# EAGLE board OLM-base_v0.9 (EAGLE 6.4)
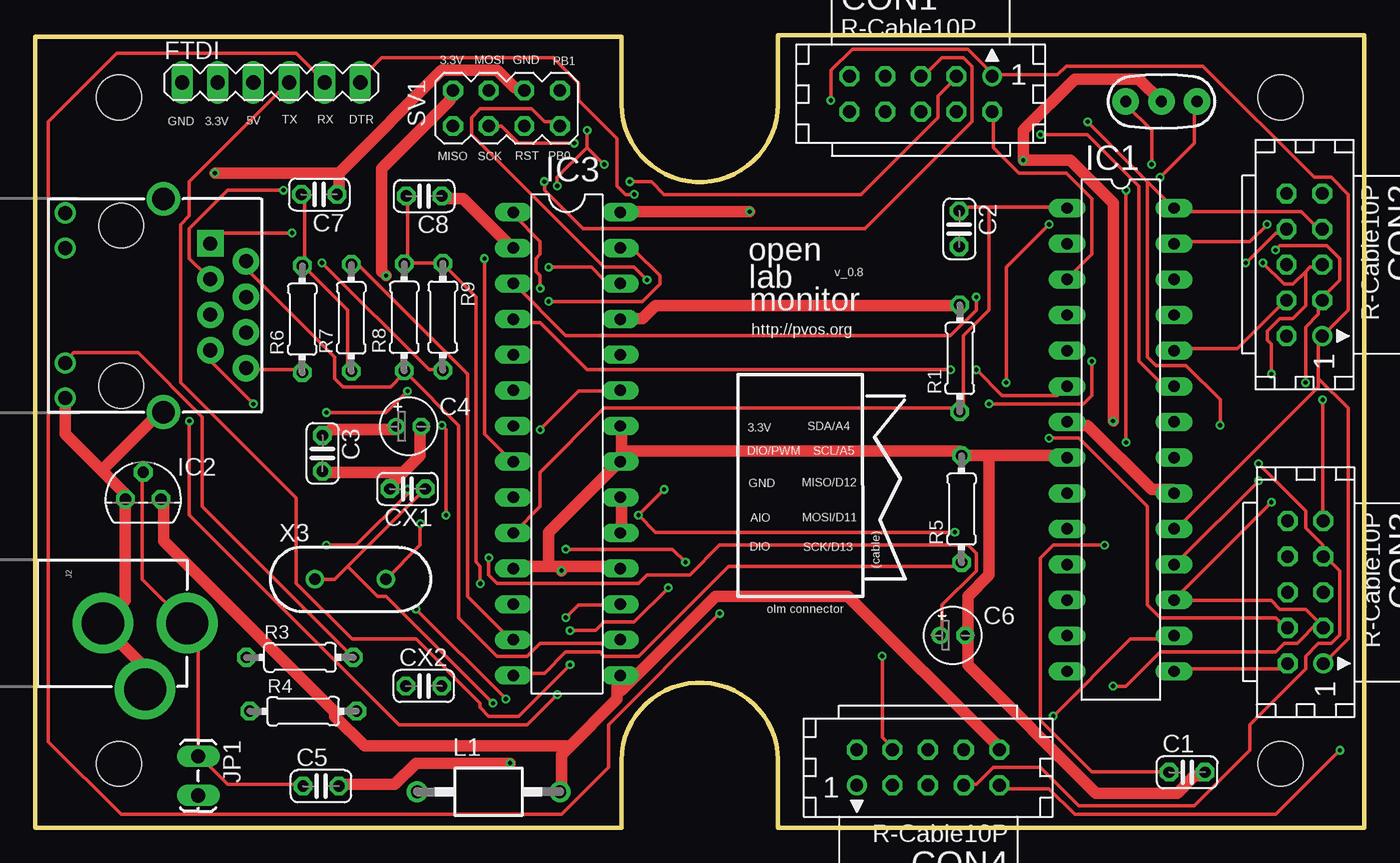
[diagram p0: board, top side]
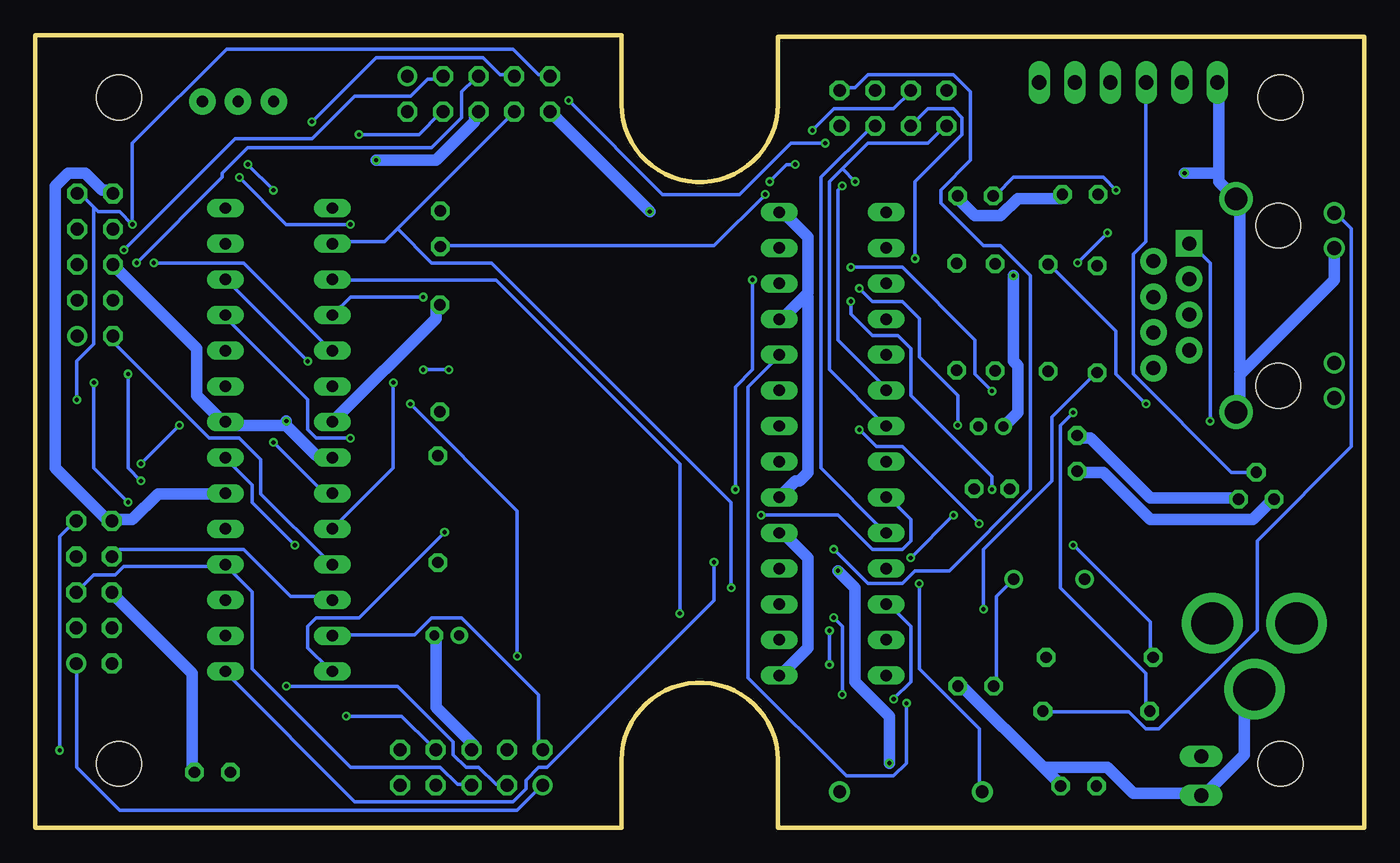
[diagram p1: board, bottom side, seen from below]

Size 94.74 x 56.52 mm. Coordinates in mm from the lower left corner, seen from the top.
Outline: 94.62,0 52.96,0 52.96,4.85
Outline: 41.78,4.9 41.78,0 0,0 0,56.39 41.78,56.39 41.78,51.51
Outline: 41.78,4.83 arc-179 52.96,4.83
Outline: 41.78,51.56 arc179 52.96,51.56 52.96,56.52 94.74,56.52 94.74,0
Copper layers (1*16): Top 0.035mm / dielectric 1.5mm / Bottom 0.035mm
Design rules "EagleRules": minimum track width 7mil, minimum drill 12mil, track to track 7mil, track to pad 7mil, pad to pad 7mil, via to via 7mil, smd to smd 0mil, copper to edge 20mil, drill to drill 10mil, minimum pad ring 10mil, minimum via ring 6mil, stop-mask expansion 2mil, vias tented up to drill 25mil, thermal gap 10mil
Net classes: 0 default: width 0.254 mm, drill 0.254 mm, clearance 0.254 mm; 1 power: width 0.813 mm, drill 0.254 mm, clearance 0.254 mm; 2 gnd: width 0.305 mm, drill 0.559 mm, clearance 0.254 mm
Holes 3.2 mm at 5.97,52.07 88.77,52.07 88.77,4.57 5.97,4.57

## Footprints (pad centres in the part's own frame; a part is rotated, then mirrored left to right if it is on the bottom)
C025-024X044 = drill 0.813 octagon: 1 -1.27,0; 2 1.27,0
E1,8-4 = drill 0.711 pad 1.168: + -0.889,0 | drill 0.711 pad 1.168 octagon: - 0.889,0
CON10L = drill 0.914: 1 5.08,1.27 | drill 0.914 octagon: 2 5.08,-1.27; 3 2.54,1.27; 4 2.54,-1.27; 5 0,1.27; 6 0,-1.27; 7 -2.54,1.27; 8 -2.54,-1.27; 9 -5.08,1.27; 10 -5.08,-1.27
MA06-1 = drill 1.016 long: 1 0,0; 2 2.54,0; 3 5.08,0; 4 7.62,0; 5 10.16,0; 6 12.7,0
DIL28-3 = drill 0.813 long: 1 -16.51,-3.81; 2 -13.97,-3.81; 3 -11.43,-3.81; 4 -8.89,-3.81; 5 -6.35,-3.81; 6 -3.81,-3.81; 7 -1.27,-3.81; 8 1.27,-3.81; 9 3.81,-3.81; 10 6.35,-3.81; 11 8.89,-3.81; 12 11.43,-3.81; 13 13.97,-3.81; 14 16.51,-3.81; 15 16.51,3.81; 16 13.97,3.81; 17 11.43,3.81; 18 8.89,3.81; 19 6.35,3.81; 20 3.81,3.81; 21 1.27,3.81; 22 -1.27,3.81; 23 -3.81,3.81; 24 -6.35,3.81; 25 -8.89,3.81; 26 -11.43,3.81; 27 -13.97,3.81; 28 -16.51,3.81
TO92 = drill 0.813 octagon: 1 -1.27,0; 2 0,1.905; 3 1.27,0
MAGJACK = drill 1 pad 1.88 square: 1 3.175,17.445 | drill 1 pad 1.88: 2 4.445,19.985; 3 5.715,17.445; 4 6.985,19.985; 5 8.255,17.445; 6 9.525,19.985; 7 10.795,17.445; 8 12.065,19.985 | drill 1 pad 1.27: 9 1,7.1; 10 3.5,7.1; 11 11.7,7.1; 12 14.2,7.1 | drill 1.6 pad 2.184: M1 0,14.1; M2 15.2,14.1 | hole 3.2: 1.905,11.095; 13.335,11.095
POWER_JACK_PTH = drill 2.997 pad 4.318: GND 0,7.7; GNDBREAK 4.7,10.7; PWR 0,13.7
1X02_LOCK_LONGPADS = drill 1.016 long: 1 -0.127,0; 2 2.667,0
BL01RN1A = drill 0.9 pad 1.5: 1 -5.08,0; 2 5.08,0
0204/7 = drill 0.813 octagon: 1 -3.81,0; 2 3.81,0
MA04-2 = drill 0.9 octagon: 1 -3.81,-1.27; 2 -3.81,1.27; 3 -1.27,-1.27; 4 -1.27,1.27; 5 1.27,-1.27; 6 1.27,1.27; 7 3.81,-1.27; 8 3.81,1.27
RESONATOR-PTH = drill 0.8 pad 1.88: 1 -2.54,0; 2 0,0; 3 2.54,0
HC49US = drill 0.813: 1 -2.54,0; 2 2.54,0

## Placement (x,y rotation side)
C1  0.1µ  [C025-024X044]  82.1,3.96 0 top
C2  0.1µ  [C025-024X044]  65.87,42.71 270 top
C3  0.1µ  [C025-024X044]  20.48,26.7 270 top
C4  10µ  [E1,8-4]  26.63,28.62 0 top
C5  0.1µ  [C025-024X044]  20.37,2.98 0 top
C6  10u  [E1,8-4]  65.4,13.73 0 top
C7  0.1µ  [C025-024X044]  20.25,45.15 180 top
C8  0.1µ  [C025-024X044]  27.73,45.04 180 top
CON1  [CON10L]  63.13,52.32 0 top
CON2  [CON10L]  90.46,40.15 270 top
CON3  [CON10L]  90.54,16.79 270 top
CON4  [CON10L]  63.64,4.3 180 top
CX1  18p  [C025-024X044]  26.54,24.16 180 top
CX2  18p  [C025-024X044]  27.7,10.12 0 top
FTDI  FTDI  [MA06-1]  10.48,53.13 0 top
IC1  ATMEGA  [DIL28-3]  77.38,27.67 270 top
IC2  MCP1702-33  [TO92]  7.71,23.44 0 top
IC3  ENC28J60SP  [DIL28-3]  37.9,27.38 270 top
J1  MAGJACK  [MAGJACK]  -4.96,44.84 270 top
J2  POWER_JACKPTH  [POWER_JACK_PTH]  -2.86,14.59 270 top
JP1  BATT  [1X02_LOCK_LONGPADS]  11.63,4.98 270 top
L1  BL01RN1A  [BL01RN1A]  32.32,2.57 0 top
R1  10k  [0204/7]  65.91,33.47 90 top
R3  1K  [0204/7]  18.88,12.15 0 top
R4  1K  [0204/7]  19.11,8.31 0 top
R5  2.32K  [0204/7]  66.03,22.73 90 top
R6  49.9  [0204/7]  19.04,36.27 90 top
R7  49.9  [0204/7]  22.53,36.36 90 top
R8  49.9  [0204/7]  26.31,36.39 90 top
R9  49.9  [0204/7]  29.06,36.42 270 top
SV1  SPI/ISP  [MA04-2]  33.6,51.3 0 top
X1  16 MHz  [RESONATOR-PTH]  80.27,51.78 0 top
X3  25MHz  [HC49US]  22.47,17.72 0 top

## Library data of the parts
C1-C8 CX1 CX2 R1 = resistor
CON1-CON4 = con-harting; OC_FARNELL: unknown; OC_NEWARK: unknown
FTDI IC2 SV1 = JeeLabs
IC1 = atmega8
IC3 = microchip; MF: MICROCHIP; MPN: ENC28J60/SP; OC_FARNELL: 1084619; OC_NEWARK: 96K3661
J1 JP1 X1 X3 = SparkFun
J2 = SparkFun-Connectors
L1 = inductors
R3-R9 = rcl

## Nets
A0: CON1.4 IC1.23
A1: CON2.4 IC1.24
A2: CON3.4 IC1.25
A3: CON4.4 IC1.26
D0/RX: CON1.8 FTDI.4 IC1.2
D1/TX: CON1.2 FTDI.5 IC1.3
D2: IC1.4 IC3.3
D3/PWM: CON2.8 IC1.5
D4: IC1.6 IC3.4
D5/PWM: CON2.2 IC1.11
D6/PWM: CON3.8 IC1.12
D7: CON4.2 IC1.13
D10/PWM: CON4.8 IC1.16
GND [power]: C1.2 C3.2 C4.- C5.2 C6.- C7.1 C8.1 CON1.6 CON2.6 CON3.6 CON4.6 CX1.2 CX2.2 FTDI.1 IC1.8 IC1.22 IC2.1 IC3.2 IC3.11 IC3.18 IC3.21 IC3.22 J1.10 J1.12 J1.M1 J1.M2 J2.GND J2.GNDBREAK JP1.2 R5.2 SV1.6 X1.2
LEDA: J1.11 R3.2
LEDB: J1.9 R4.2
MISO/D12: CON1.5 CON2.5 CON3.5 CON4.5 IC1.18 IC3.7 SV1.1
MOSI/D11: CON1.3 CON2.3 CON3.3 CON4.3 IC1.17 IC3.6 SV1.4
N$1: IC1.9 X1.1
N$19: C1.1 IC1.21
N$20: C2.2 FTDI.6
N$21: IC1.10 X1.3
N$37: IC3.27 R3.1
N$39: IC3.26 R4.1
N$50: C6.+ IC3.1
N$51: IC3.14 R5.1
N$52: CX1.1 IC3.24 X3.1
N$53: CX2.1 IC3.23 X3.2
N$54: C7.2 R6.2 R7.1
PB0/D8: IC1.14 IC3.9 SV1.7
PB1/D9/PWM: CON3.2 IC1.15 SV1.8
RD+: IC3.13 J1.7 R7.2
RD-: IC3.12 J1.8 R6.1
RESET: C2.1 IC1.1 IC3.10 R1.1 SV1.5
SCK/D13: CON1.1 CON2.1 CON3.1 CON4.1 IC1.19 IC3.8 SV1.3
SCL/A5: CON1.7 CON2.7 CON3.7 CON4.7 IC1.28
SDA/A4: CON1.9 CON2.9 CON3.9 CON4.9 IC1.27
TCT: C8.2 J1.3 L1.1 R8.2 R9.1
TD+: IC3.17 J1.1 R9.2
TD-: IC3.16 J1.2 R8.1
VCC [power]: C3.1 C4.+ CON1.10 CON2.10 CON3.10 CON4.10 IC1.7 IC1.20 IC2.3 IC3.15 IC3.19 IC3.20 IC3.25 IC3.28 L1.2 R1.2 SV1.2
VIN: C5.1 FTDI.3 IC2.2 J2.PWR JP1.1

## Tracks (layer width: path | path; a pad name or v marks a point on that pad's centre or on a via)
A0  (via drill 0.3)
  Top 0.254: v71.65,49.42 75.01,49.42 78.66,45.76 78.66,33.27 80.19,31.74 81.1,31.74 IC1.23
  Bottom 0.254: v71.65,49.42 67.39,49.42 65.86,50.95 CON1.4
A1
  Top 0.254: IC1.24 81.41,34.18 85.67,34.18 89.03,37.53 CON2.4
A2  (via drill 0.3)
  Top 0.254: v72.26,27.78 74.4,27.78 79.27,22.9 79.27,15.89 80.19,14.98 88.42,14.98 89.03,14.37 CON3.4
  Bottom 0.254: v72.26,27.78 74.7,27.78 75.31,28.39 75.31,30.52 81.1,36.31 IC1.25
A3  (via drill 0.3)
  Top 0.254: v75.31,33.27 75.31,30.83 74.7,30.22 v68,30.22 | v60.38,12.24 60.38,6.44 60.99,5.83 CON4.4
  Bottom 0.254: v75.31,33.27 81.1,39.06 IC1.26 | v68,30.22 60.38,22.6 v60.38,12.24
D0/RX  (via drill 0.3)
  Top 0.254: v38.13,11.63 34.47,7.97 32.33,7.97 31.72,8.58 31.72,8.88 27.15,13.45 22.58,13.45 18.62,17.42 18.62,23.51 10.39,31.74 10.39,43.02 11,43.63 11,46.07 18.01,53.08 FTDI.4 | v38.13,14.06 39.95,14.06 40.56,14.67 42.7,14.67 v45.14,17.11
  Bottom 0.254: 68.91,42.72 60.68,50.95 CON1.8 | 68.91,42.72 69.82,41.8 73.48,41.8 IC1.2 | v38.13,14.06 v38.13,11.63 | v45.14,17.11 45.14,23.21 62.2,40.28 66.47,40.28 68.91,42.72
D1/TX  (via drill 0.3)
  Top 0.254: IC1.3 73.79,39.36 75.31,40.89 75.31,44.85 73.48,46.68 70.13,46.68 68.3,48.51 68.3,50.95 CON1.2 | v48.79,15.28 40.87,7.36 40.87,4.31 37.52,0.96 6.12,0.96 0.94,6.14 0.94,50.34 5.82,55.21 18.62,55.21 20.45,53.38 FTDI.5
  Bottom 0.254: v48.79,15.28 48.79,25.95 61.9,39.06 73.48,39.06 IC1.3
D2  (via drill 0.3)
  Top 0.254: v67.08,37.84 67.08,36.92 65.25,35.1 37.82,35.1 34.16,38.75 IC3.3
  Bottom 0.254: v67.08,37.84 72.26,37.84 73.48,36.62 IC1.4
D3/PWM  (via drill 0.3)
  Top 0.254: v86.28,40.28 88.42,42.41 89.03,42.41 CON2.8
  Bottom 0.254: v86.28,40.28 79.88,40.28 73.79,34.18 IC1.5
D4  (via drill 0.3)
  Top 0.254: v65.25,32.66 39.34,32.66 35.99,36.01 34.16,36.01 IC3.4 | v67.08,32.66 68.91,30.83 72.87,30.83 73.48,31.44 IC1.6
  Bottom 0.254: v67.08,32.66 v65.25,32.66
D5/PWM
  Bottom 0.254: IC1.11 73.79,18.94 78.66,23.82 78.66,26.26 80.19,27.78 82.32,27.78 89.33,34.79 CON2.2
D6/PWM
  Bottom 0.254: IC1.12 73.79,16.5 76.53,16.5 79.88,19.86 88.72,19.86 89.03,19.55 CON3.8
D7
  Bottom 0.254: IC1.13 73.48,13.76 67.69,13.76 66.47,14.98 64.34,14.98 58.85,9.49 58.85,5.83 CON4.2
D10/PWM  (via drill 0.3)
  Top 0.254: v72.57,7.97 78.05,13.45 81.1,13.45 IC1.16
  Bottom 0.254: v72.57,7.97 68.61,7.97 66.47,5.83 CON4.8
GND  (via drill 0.3)
  Top 0.813: 26.09,25.19 25.32,24.43 CX1.2 | 26.09,25.19 27.46,26.56 27.46,28.39 C4.- | C3.2 20.75,25.34 25.93,25.34 26.09,25.19 | 4.75,25.49 6.43,23.82 IC2.1 6.43,23.21 6.43,16.2 4.9,14.67 J2.GND 4.9,14.37 7.65,11.63 7.65,10.1 J2.GNDBREAK | 4.75,25.49 2.16,28.09 2.16,30.52 J1.12 | C8.1 29.29,44.85 30.51,44.85 33.86,41.5 IC3.2 | 21.67,46.68 28.98,53.99 32.94,53.99 34.16,52.77 34.77,52.77 SV1.6 | 21.67,46.68 21.67,45.15 C7.1 | v12.83,46.68 21.67,46.68 | 4.75,25.49 8.86,29.61 J1.M2 | X1.2 80.19,51.86 78.66,53.38 74.09,53.38 70.43,49.73 v70.43,47.59 73.79,47.59 76.84,44.54 v76.84,29 | 41.78,26.87 41.78,28.39 IC3.22 | 41.78,26.87 41.78,26.26 IC3.21 41.48,25.95 36.6,21.07 36.6,18.64 | 37.52,18.64 41.48,18.64 IC3.18 | 37.52,18.64 36.6,18.64 | 36.6,18.64 34.16,18.64 IC3.11 | 68,26.56 66.17,26.56 R5.2 65.86,26.87 41.78,26.87 | 68,26.56 73.48,26.56 IC1.8 | 68,26.56 68,18.03 66.47,16.5 66.47,13.76 C6.- 66.47,13.45 66.47,11.63 75.62,2.48 81.41,2.48 82.63,3.7 83.24,3.7 C1.2 | v33.86,4.62 27.15,4.62 25.63,3.09 21.67,3.09 C5.2 | v37.52,18.33 37.52,18.64
  Bottom 0.813: 22.73,4.16 28.68,10.1 CX2.2 | 22.73,4.16 21.67,3.09 C5.2 | 22.73,4.16 22.58,4.31 18.31,4.31 16.48,2.48 11.91,2.48 JP1.2 11.3,2.48 8.56,5.23 8.56,9.19 7.95,9.8 J2.GNDBREAK | C3.2 20.45,25.34 18.62,25.34 15.27,21.99 7.95,21.99 6.73,23.21 IC2.1 | C7.1 21.67,44.85 24.71,44.85 25.93,43.63 27.76,43.63 28.98,44.85 C8.1 | 10.39,46.68 10.39,46.07 9.17,44.85 J1.M1 8.86,44.54 8.86,32.66 8.71,32.5 | 10.39,46.68 10.39,53.08 FTDI.1 | 8.71,32.5 8.86,32.35 8.86,29.91 J1.M2 | 8.71,32.5 2.16,39.06 2.16,41.19 J1.10 | 10.39,46.68 v12.83,46.68 | v70.43,47.59 66.17,47.59 63.42,50.34 63.42,50.95 CON1.6 | C1.2 83.54,4.01 83.54,11.02 89.03,16.5 CON3.6 | C6.- 66.17,13.45 66.17,8.58 63.42,5.83 CON4.6 | 76.84,28.69 81.1,28.69 IC1.22 81.41,29 83.24,30.83 83.24,34.18 89.03,39.97 CON2.6 | 76.84,28.69 74.7,26.56 73.79,26.56 IC1.8 | v76.84,29 76.84,28.69 | v33.86,4.62 33.86,7.97 36.3,10.41 36.3,17.11 v37.52,18.33
LEDA
  Top 0.254: R3.2 22.58,12.24 11.91,22.9 11.91,29.3 7.34,33.88 2.77,33.88 2.16,33.27 J1.11
LEDB
  Bottom 0.254: R4.2 22.89,8.27 16.79,8.27 15.57,7.05 14.66,7.05 7.65,14.06 7.65,20.47 0.94,27.17 0.94,42.72 1.85,43.63 J1.9
MISO/D12  (via drill 0.3)
  Top 0.254: 90.55,39.67 89.64,38.75 89.03,38.75 v87.5,40.28 | 90.55,39.67 90.86,39.97 91.47,39.97 CON2.5 | v36.3,46.07 36.3,45.46 39.04,42.72 59.16,42.72 66.78,50.34 66.78,54.3 66.17,54.91 64.64,54.91 63.42,53.69 CON1.5 | v87.2,24.73 81.41,18.94 IC1.18 | v88.11,32.35 88.11,34.49 87.81,34.79 87.81,35.4 88.72,36.31 89.64,36.31 90.55,37.23 90.55,39.67
  Bottom 0.254: CON3.5 91.77,16.81 90.55,18.03 89.03,18.03 88.42,18.64 81.41,18.64 IC1.18 81.1,18.64 79.27,16.81 79.27,11.32 72.26,4.31 65.86,4.31 64.64,3.09 63.73,3.09 CON4.5 | 37.21,46.98 35.38,48.81 31.12,48.81 29.9,50.03 SV1.1 | 37.21,46.98 38.13,46.07 38.13,32.66 34.16,28.69 IC3.7 | v87.5,40.28 81.41,46.37 81.41,46.68 79.58,48.51 66.47,48.51 64.34,50.64 64.34,52.47 63.42,53.38 CON1.5 | v36.3,46.07 37.21,46.98 | v87.2,24.73 88.11,25.65 v88.11,32.35
MOSI/D11  (via drill 0.3)
  Top 0.254: v37.21,45.76 37.21,46.37 39.34,48.51 | v39.34,49.73 39.34,48.51 | 91.47,14.67 91.77,14.37 CON3.3 91.47,14.67 | 91.47,14.67 90.55,15.59 88.72,15.59 88.11,16.2 81.41,16.2 IC1.17 81.41,16.5 v88.11,23.21 | v76.84,10.1 77.75,10.1 80.19,12.54 88.42,12.54 89.03,13.15 89.94,13.15 91.47,14.67 | v90.55,31.74 90.55,35.71 91.47,36.62 91.47,37.53 CON2.3 91.77,37.84 92.99,39.06 92.99,40.58 92.08,41.5 88.72,41.5 v88.42,41.19 | v40.56,47.29 39.34,48.51 | v42.39,46.07 43.92,46.07 44.83,45.15 58.85,45.15 64.34,50.64 64.34,52.16 65.56,53.38 CON1.3
  Bottom 0.254: v37.21,45.76 37.52,45.46 37.52,34.79 34.16,31.44 IC3.6 | v39.34,49.73 37.82,51.25 33.55,51.25 32.33,52.47 SV1.4 | v76.84,10.1 68.91,10.1 64.95,6.14 64.95,5.23 64.03,4.31 63.12,4.31 61.9,3.09 61.29,3.09 CON4.3 | v90.55,31.74 90.55,25.65 v88.11,23.21 | v88.42,41.19 80.49,49.12 75.01,49.12 71.96,52.16 68,52.16 66.78,53.38 65.86,53.38 CON1.3 | v40.56,47.29 41.17,47.29 v42.39,46.07
N$1  (via drill 0.3)
  Top 0.254: v77.75,45.46 v77.75,27.48 | v79.58,47.29 79.58,49.73 77.75,51.55 X1.1
  Bottom 0.254: v77.75,27.48 74.4,24.12 73.79,24.12 IC1.9 | v79.58,47.29 v77.75,45.46
N$19  (via drill 0.3)
  Top 0.254: v76.23,20.16 72.57,20.16 71.65,19.25 71.65,7.66 75.31,4.01 80.8,4.01 C1.1
  Bottom 0.254: v76.23,20.16 79.27,23.21 79.27,24.43 81.1,26.26 IC1.21
N$20  (via drill 0.3)
  Top 0.254: v42.7,45.15 42.09,45.15 41.48,45.76 41.48,49.12 38.74,51.86 38.74,53.08 36.91,54.91 24.71,54.91 23.19,53.38 FTDI.6
  Bottom 0.254: v42.7,45.15 46.36,41.5 65.86,41.5 C2.2
N$21  (via drill 0.3)
  Top 0.254: v69.22,31.74 69.22,39.97 v72.26,43.02 | v80.19,46.37 82.63,48.81 82.63,51.55 X1.3
  Bottom 0.254: v69.22,31.74 69.22,25.65 73.48,21.38 IC1.10 | v72.26,43.02 76.84,43.02 v80.19,46.37
N$37  (via drill 0.3)
  Top 0.254: v20.75,20.16 22.89,20.16 26.54,23.82 v26.54,24.12 | v36.6,37.53 43.31,37.53 44.53,38.75 44.53,39.36 42.7,41.19 41.78,41.19 IC3.27
  Bottom 0.254: v20.75,20.16 15.27,14.67 15.27,12.24 R3.1 | v26.54,24.12 26.54,25.04 32.33,30.83 32.33,34.18 33.25,35.1 35.08,35.1 36.6,36.62 v36.6,37.53
N$39  (via drill 0.3)
  Top 0.254: v20.75,29.61 25.02,29.61 v26.54,31.13 | v36.6,39.97 39.65,39.97 40.56,39.06 41.48,39.06 IC3.26
  Bottom 0.254: v20.75,29.61 21.67,28.69 21.67,17.11 15.57,11.02 15.57,8.58 R4.1 | v26.54,31.13 27.76,32.35 27.76,34.79 32.94,39.97 v36.6,39.97
N$50  (via drill 0.3)
  Top 0.254: v32.33,19.25 32.33,18.03 32.94,17.42 43,17.42 43.61,18.03 46.66,18.03 48.79,20.16 66.47,20.16 67.08,19.55 67.08,18.33 64.64,15.89 64.64,13.76 C6.+ | v29.29,22.29 29.29,28.39 v28.98,28.69 | v35.99,38.45 35.99,39.36 35.69,39.67 35.69,40.58 35.99,40.89 35.99,41.8 34.16,43.63 IC3.1
  Bottom 0.254: v29.29,22.29 v32.33,19.25 | v28.98,28.69 28.98,30.83 31.72,33.57 31.72,36.31 32.94,37.53 35.08,37.53 v35.99,38.45
N$51
  Top 0.254: IC3.14 34.16,11.02 36.3,11.02 37.82,12.54 40.26,12.54 40.56,12.24 43,12.24 49.4,18.64 65.86,18.64 R5.1
N$52  (via drill 0.3)
  Top 0.254: X3.1 21.36,17.72 22.28,18.64 | 22.28,18.64 27.76,24.12 CX1.1 | v32.64,8.88 25.02,16.5 24.41,16.5 22.28,18.64
  Bottom 0.254: v32.64,8.88 32.64,4.62 33.55,3.7 36.91,3.7 43.92,10.71 43.92,31.44 41.78,33.57 IC3.24
N$53  (via drill 0.3)
  Top 0.254: v35.99,28.39 38.74,31.13 41.48,31.13 IC3.23 | v27.46,21.68 27.46,20.16 X3.2
  Bottom 0.254: CX2.1 26.24,10.41 26.24,16.5 X3.2 | v35.99,28.39 34.77,27.17 32.94,27.17 v27.46,21.68
N$54
  Top 0.254: R7.1 22.28,32.66 22.28,36.92 19.23,39.97 R6.2 19.23,40.28 19.23,44.85 C7.2
PB0/D8  (via drill 0.3)
  Top 0.254: v65.56,21.07 44.22,21.07 v43,22.29 v44.83,24.12 | v43.61,39.06 42.7,39.97 40.56,39.97 31.12,49.42 31.12,50.64 31.72,51.25 35.38,51.25 36.3,50.34 37.21,50.34 SV1.7
  Bottom 0.254: v65.56,21.07 71.65,14.98 74.7,14.98 75.31,14.37 75.31,12.85 73.79,11.32 IC1.14 | v43,22.29 37.52,22.29 35.08,19.86 32.94,19.86 32.33,20.47 32.33,21.99 33.86,23.51 IC3.9 | v43.61,39.06 43.61,32.66 44.83,31.44 v44.83,24.12
PB1/D9/PWM  (via drill 0.3)
  Top 0.254: IC1.15 81.41,11.32 88.72,11.32 89.03,11.63 CON3.2 | v37.82,19.86 45.44,19.86 v46.36,18.94
  Bottom 0.254: v37.82,19.86 35.38,17.42 32.94,17.42 32.03,18.33 29.59,18.33 23.8,24.12 23.8,39.36 25.93,41.5 27.15,41.5 30.2,44.54 30.2,45.46 28.07,47.59 28.07,52.47 29.29,53.69 35.38,53.69 36.3,52.77 37.21,52.77 SV1.8 | v46.36,18.94 46.36,16.2 58.24,4.31 58.85,4.31 59.77,3.4 59.77,2.79 60.68,1.87 71.96,1.87 81.1,11.02 IC1.15
RD+  (via drill 0.3)
  Top 0.254: IC3.13 33.86,13.45 30.81,16.5 30.81,32.35 23.19,39.97 22.58,39.97 R7.2 | v15.57,30.22 12.52,33.27 12.52,33.88 J1.7
  Bottom 0.254: v15.57,30.22 17.7,32.35 17.7,35.4 22.28,39.97 R7.2
RD-  (via drill 0.3)
  Top 0.254: R6.1 18.92,32.66 15.27,32.66 J1.8 | v27.15,15.59 v33.55,9.19
  Bottom 0.254: v33.55,9.19 32.33,10.41 32.33,14.37 33.86,15.89 IC3.12 | v27.15,15.59 27.15,19.86 22.28,24.73 22.28,29.3 19.23,32.35 R6.1
RESET
  Top 0.254: 68,44.24 73.48,44.24 IC1.1 | 68,44.24 66.17,44.24 C2.1 | 68,44.24 68,36.92 66.17,35.1 66.17,29.91 R1.1 65.86,29.91 40.56,29.91 35.99,25.34 35.99,22.9 34.16,21.07 IC3.10
  Bottom 0.254: IC3.10 34.16,21.07 38.74,25.65 38.74,46.37 35.08,50.03 SV1.5
SCK/D13  (via drill 0.3)
  Top 0.254: v32.03,40.58 32.03,28.09 33.86,26.26 IC3.8 | 91.47,32.05 91.47,34.79 CON2.1 91.77,35.1 93.6,36.92 93.6,45.15 92.38,46.37 91.16,46.37 83.24,54.3 73.48,54.3 72.87,53.69 68.3,53.69 | 91.47,32.05 91.47,31.44 81.41,21.38 IC1.19 | v38.43,48.81 34.47,48.81 33.25,50.03 SV1.3 | v56.72,51.86 56.72,53.99 58.24,55.52 66.47,55.52 68.3,53.69 | 68.3,53.69 CON1.1 | 91.47,32.05 93.6,29.91 93.6,13.45 92.08,11.93 CON3.1
  Bottom 0.254: CON4.1 58.85,2.79 60.38,1.26 88.72,1.26 91.77,4.31 91.77,11.63 CON3.1 | v32.03,40.58 32.03,46.07 28.68,49.42 28.68,50.64 29.29,51.25 31.12,51.25 32.03,50.34 SV1.3 | v38.43,48.81 40.87,48.81 44.53,45.15 50.01,45.15 v56.72,51.86
SCL/A5  (via drill 0.3)
  Top 0.254: CON4.7 66.47,3.09 67.08,3.09 68.3,4.31 71.65,4.31 74.4,1.57 82.63,1.57 86.59,5.53 86.59,7.36 90.55,11.32 90.55,12.24 91.47,13.15 92.38,13.15 92.99,13.76 92.99,18.33 92.08,19.25 CON3.7 91.77,19.55 91.77,20.16 90.55,21.38 90.55,22.6 v87.2,25.95 | CON2.7 91.47,42.72 90.25,43.93 81.41,43.93 IC1.28 81.1,44.24 79.27,46.07 | 79.27,46.07 v75.01,50.34 | v84.46,28.69 84.46,30.52 82.02,32.96 79.88,32.96 79.27,33.57 79.27,46.07
  Bottom 0.254: v75.01,50.34 70.43,54.91 62.81,54.91 61.6,53.69 60.68,53.69 CON1.7 | v84.46,28.69 v87.2,25.95
SDA/A4  (via drill 0.3)
  Top 0.254: v92.99,5.53 88.42,0.96 74.09,0.96 72.26,2.79 68.91,2.79 CON4.9 | v87.81,43.02 86.59,41.8 81.41,41.8 IC1.27 | v91.77,30.52 91.77,21.99 CON3.9
  Bottom 0.254: v92.99,5.53 92.99,20.77 92.08,21.68 CON3.9 | 90.55,44.24 91.47,45.15 CON2.9 | 90.55,44.24 90.25,43.93 88.72,43.93 v87.81,43.02 87.81,48.81 81.1,55.52 60.68,55.52 58.85,53.69 58.24,53.69 CON1.9 | v91.77,30.52 91.77,33.27 90.55,34.49 90.55,44.24
TCT  (via drill 0.3)
  Top 0.254: 26.54,40.28 28.98,40.28 R9.1 29.29,39.97 31.42,37.84 31.42,18.94 31.72,18.64 v31.72,17.42 | 26.54,40.28 26.54,44.85 C8.2 | 26.54,40.28 R8.2 | v17.7,45.46 13.74,45.46 11,42.72 11,40.58 12.22,39.36 J1.3
  Bottom 0.254: v31.72,17.42 31.72,11.32 27.46,7.05 27.46,2.79 L1.1 | v17.7,45.46 18.62,46.37 25.02,46.37 26.24,45.15 C8.2
TD+  (via drill 0.3)
  Top 0.254: v20.45,40.28 28.07,32.66 28.98,32.66 R9.2 | v18.31,42.41 13.13,42.41 12.52,41.8 J1.1 | v37.82,14.98 38.74,15.89 41.48,15.89 IC3.17 | v37.21,9.49 35.08,7.36 25.93,7.36 11,22.29 v11,29
  Bottom 0.254: v18.31,42.41 v20.45,40.28 | v37.82,14.98 37.21,14.37 v37.21,9.49 | v11,29 11,40.28 12.22,41.5 J1.1
TD-
  Top 0.254: IC3.16 41.48,13.15 35.99,13.15 35.08,12.24 32.94,12.24 30.2,14.98 30.2,28.69 26.54,32.35 R8.1 26.24,32.35 25.32,31.44 21.97,31.44 21.36,32.05 21.36,33.57 15.27,39.67 15.27,40.28 J1.2
VCC  (via drill 0.3)
  Top 0.813: C4.+ 25.63,28.39 21.06,28.39 20.75,28.09 C3.1 | v25.02,39.36 24.71,39.67 24.71,46.98 29.59,51.86 29.59,52.47 SV1.2 | IC1.7 73.79,28.69 75.01,28.69 79.58,24.12 81.1,24.12 IC1.20 | 41.48,9.8 41.48,9.19 37.97,5.68 | 41.48,9.8 41.48,10.71 IC3.15 | 37.97,5.68 37.52,5.23 37.52,2.79 L1.2 | CON4.10 68.61,5.83 57.94,16.5 48.49,16.5 41.78,9.8 41.48,9.8 | IC3.19 41.78,21.07 41.78,23.51 IC3.20 | v50.93,43.93 41.78,43.93 IC3.28 | R1.2 65.86,37.23 44.22,37.23 43.31,36.31 41.78,36.31 IC3.25 | IC2.3 9.17,23.21 9.17,20.47 21.36,8.27 21.36,7.97 23.5,5.83 37.82,5.83 37.97,5.68
  Bottom 0.813: IC2.3 9.17,23.51 15.27,23.51 19.53,27.78 20.45,27.78 C3.1 | v25.02,39.36 25.02,33.27 24.71,32.96 24.71,29.61 25.63,28.69 C4.+ | IC1.7 73.48,29 66.17,36.31 66.17,37.23 R1.2 | IC1.20 81.41,23.82 85.98,23.82 87.81,21.99 89.03,21.99 CON3.10 89.64,21.99 93.29,25.65 93.29,45.76 92.38,46.68 91.16,46.68 89.94,45.46 89.33,45.46 CON2.10 | 39.8,37.99 39.65,38.14 39.65,42.11 41.48,43.93 IC3.28 | 39.8,37.99 41.48,36.31 IC3.25 | v50.93,43.93 57.94,50.95 CON1.10 | IC3.20 41.48,23.82 40.56,24.73 40.26,24.73 39.65,25.34 39.65,37.84 39.8,37.99 | IC3.15 41.48,11.02 39.65,12.85 39.65,19.25 41.48,21.07 IC3.19
VIN
  Top 0.254: C5.1 18.92,3.09 13.74,3.09 11.91,4.92 JP1.1 11.61,5.23 11.61,13.76 11,14.37 J2.PWR 10.69,14.67 7.65,17.72 7.65,25.34 IC2.2
  Bottom 0.254: IC2.2 9.47,25.34 16.48,32.35 16.48,40.89 15.57,41.8 15.57,53.08 FTDI.3

## Text on the board
tPlace: 3.3V | MOSI | GND | PB1 | GND | 3.3V | 5V | TX | RX | DTR | MISO | SCK | RST | PB0 | open | v_0.8 | lab | monitor | http://pvos.org | 3.3V | SDA/A4 | DIO/PWM | SCL/A5 | GND | MISO/D12 | AIO | MOSI/D11 | DIO | SCK/D13 | (cable) | olm connector